# Altium PCB MSD.PcbDoc
Units mil, origin at the board's own origin, x right, y up, seen from the top; angles counter-clockwise.
Board outline 4360 x 1060 mil, 2 copper layers (Top Layer, Bottom Layer); 7 components, 3 nets, 15 pads, 0 vias.
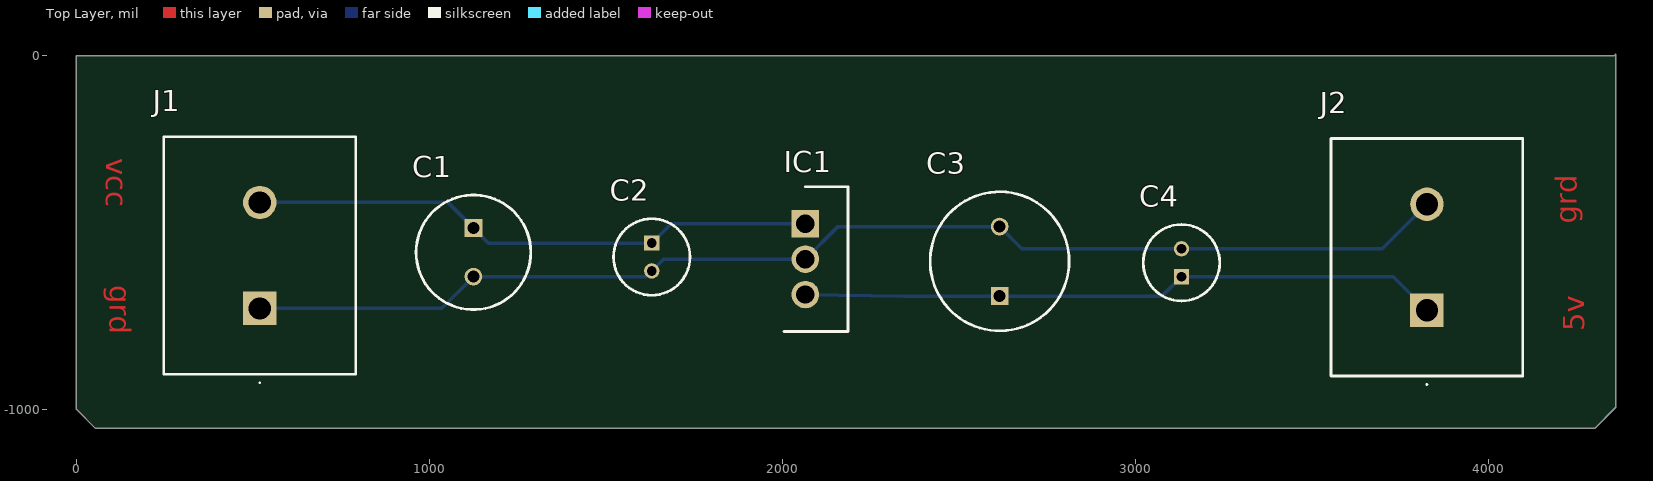
[diagram p0: Top Layer view]
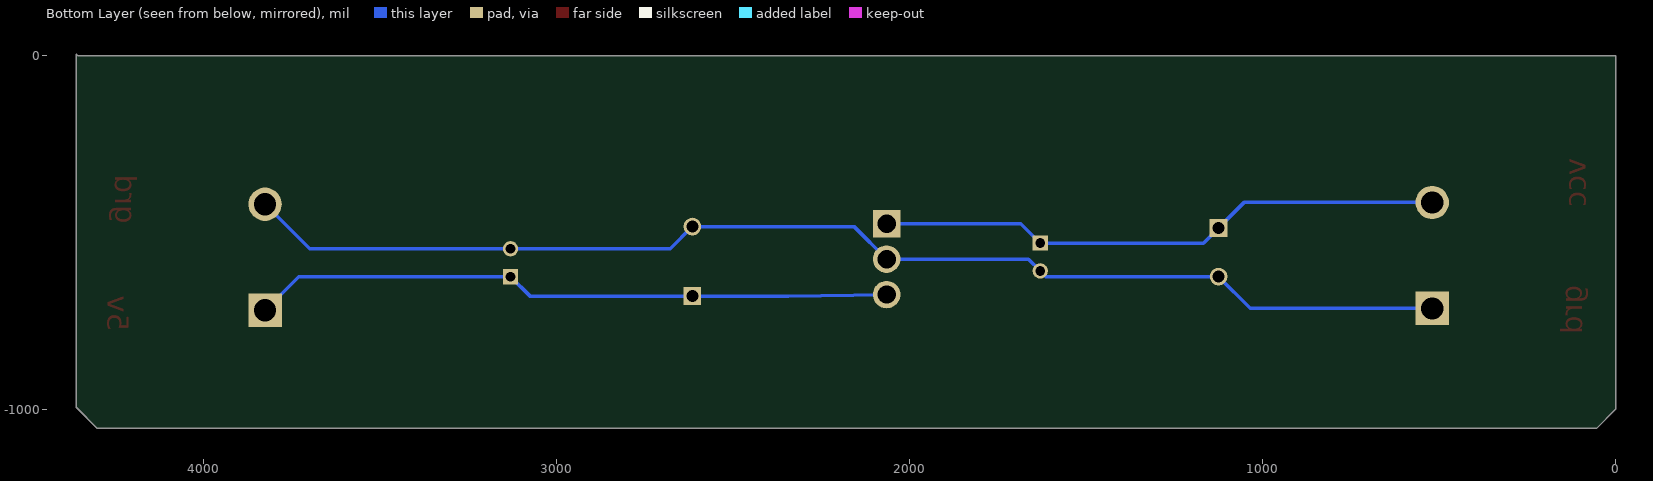
[diagram p1: Bottom Layer view, seen from below]
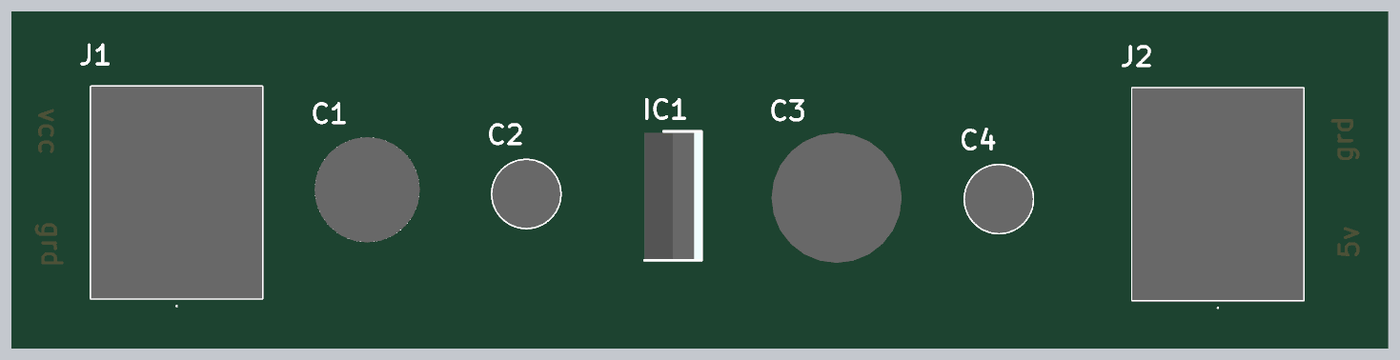
[diagram p2: 3D render of the assembled board from above, using the file's embedded part models]

## Layer stack, top to bottom
Top Solder: solder mask 0.4, Solder Resist, Dk 3.5
Top Layer: signal copper 1.4
Dielectric 1: dielectric 12.6, FR-4, Dk 4.8
Bottom Layer: signal copper 1.4
Bottom Solder: solder mask 0.4, Solder Resist, Dk 3.5

## Board outline
55,-1055 0,-1000 0,0 4355,0 4360,5 4360,-995 4300,-1055

## Design rules (kind name [scope] priority, off if disabled: settings)
Clearance [All] p1: gap=10 ignorepadtopadclearanceinfootprint=FALSE except(0: Arc-Hole Track-Hole SMDPad-Hole THPad-Hole Via-Hole Fill-Hole Poly-Hole Region-Hole Text-Hole)
PolygonConnect [All] p1: connectstyle=Relief reliefconductorwidth=10 reliefentries=4 polygonreliefangle="90 Angle" airgapwidth=10
RoutingVias [All] p1: holewidth=28 width=50 viastyle="Through Hole" minholewidth=28 minwidth=50 maxholewidth=28 maxwidth=50
SolderMaskExpansion [All] p1: expansion=4 istentingtop=FALSE
Width [All] p1: maxlimit=10 minlimit=10 preferedwidth=10
30 further rules are at their usual default settings.

## Components (designator, comment, footprint, x,y, rotation, side; value= is the part's Value field where it differs from the comment)
C1 "1uf" CAPPRD350W65D825H1250 1125,-487.2 r270 top
C2 "0.1uf" CAPPRD200W50D550H1250 1630,-530 r270 top
C3 "10uf" CAPPRD500W65D1000H2200 2615,-680 r90 top
C4 "0.1uf" CAPPRD200W50D550H1250 3130,-625 r90 top
IC1 "L7805CV" TO255P460X1020X2008-3P 2065,-475 r270 top
J1 "KF25C-7.62-2P" KF25C7622P 520,-715 r90 top
J2 "KF25C-7.62-2P" KF25C7622P 3825,-720 r90 top

## Footprints (in the part's own frame and the unit in brackets; to place one, negate y for a bottom-side part, rotate by r counter-clockwise, add the part's x,y. Pads: shape width x height; smd on the part's side, far side on the other; paste and mask are expansions set on the pad)
CAPPRD200W50D550H1250 [mm]
  rect 1.1x1.1 hole 0.7: 1(0,0)
  round 1.1 hole 0.7: 2(2,0)
  silkscreen extent -1.75,-2.75 3.75,2.75, body extent -1.74,-2.75 3.75,2.75, height 12.5
CAPPRD350W65D825H1250 [mm]
  rect 1.275x1.275 hole 0.85: 1(0,0)
  round 1.275 hole 0.85: 2(3.5,0)
  silkscreen extent -2.37,-4.13 5.87,4.13, body extent -2.49,-4.25 6,4.25, height 12.5
CAPPRD500W65D1000H2200 [mm]
  rect 1.275x1.275 hole 0.85: 1(0,0)
  round 1.275 hole 0.85: 2(5,0)
  silkscreen extent -2.5,-5 7.5,5, body extent -2.75,-5.24 7.75,5.24, height 22
KF25C7622P [mm]
  rect 2.4x2.4 hole 1.6: 1(0,0)
  round 2.4 hole 1.6: 2(7.62,0)
  silkscreen extent -5.4,-6.9 12.36,6.9, body extent -4.73,-6.9 12.35,6.9, height 15
TO255P460X1020X2008-3P [mm]
  rect 1.98x1.98 hole 1.32: 1(0,0)
  round 1.98 hole 1.32: 2(2.55,0) 3(5.1,0)
  silkscreen extent -2.65,-1.53 7.75,3.07, body extent -2.55,-1.53 7.65,3.07, height 19.21

## Part data
C1: library part ECA-2WM010, "Capacitor Polarised", Manufacturer_Name=Panasonic, Mouser Part Number=667-ECA-2WM010, Datasheet Link=http://www.mouser.com/ds/2/315/ABA0000C1047-947484.pdf, Height=12.5mm, Manufacturer_Part_Number=ECA-2WM010, Mouser Price/Stock=https://www.mouser.com/Search/Refine.aspx?Keyword=667-ECA-2WM010
C2 C4: library part UPS1H010MDD, "Capacitor", Manufacturer_Name=Nichicon, Mouser Part Number=647-UPS1H010MDD, Datasheet Link=http://nichicon-us.com/english/products/pdfs/e-ups.pdf, Height=12.5mm, Manufacturer_Part_Number=UPS1H010MDD, Mouser Price/Stock=https://www.mouser.co.uk/ProductDetail/Nichicon/UPS1H010MDD?qs=9WxBXDvRDok3DT3K8wfJRA%3D%3D
C3: library part EEU-EB2V100, "Capacitor Polarised", Manufacturer_Name=Panasonic, Mouser Part Number=667-EEU-EB2V100, Arrow Part Number=EEU-EB2V100, Arrow Price/Stock=https://www.arrow.com/en/products/eeu-eb2v100/panasonic?region=nac, Datasheet Link=http://industrial.panasonic.com/cdbs/www-data/pdf/RDF0000/ABA0000C1024.pdf, Height=22mm, Manufacturer_Part_Number=EEU-EB2V100, Mouser Price/Stock=https://www.mouser.co.uk/ProductDetail/Panasonic/EEU-EB2V100?qs=NWUXdpDx7QA5MeFM%2FszRZQ%3D%3D
IC1: "Integrated Circuit", Manufacturer_Name=STMicroelectronics, Mouser Part Number=511-L7805CV, Arrow Part Number=L7805CV, Arrow Price/Stock=https://www.arrow.com/en/products/l7805cv/stmicroelectronics?region=europe, Datasheet Link=http://www.st.com/web/en/resource/technical/document/datasheet/CD00000444.pdf, Height=4.6mm, Manufacturer_Part_Number=L7805CV, Mouser Price/Stock=https://www.mouser.co.uk/ProductDetail/STMicroelectronics/L7805CV?qs=9NrABl3fj%2FqplZAHiYUxWg%3D%3D
J1 J2: "Connector", Manufacturer_Name=KEFA, Datasheet Link=https://datasheet.lcsc.com/lcsc/2007211836_Cixi-Kefa-Elec-KF25C-7-62-2P_C707361.pdf, Height=14.9mm, Manufacturer_Part_Number=KF25C-7.62-2P

## Nets (pads, with @x,y where several pads share a name; then routed paths per layer and width w, separated by ;. In a path a pad name is that pad's centre, name@x,y a point inside that pad or via, vN(x,y) a via of type N, cw(c..) or ccw(c..) an arc to the next point about the centre after c; other vN are vias at no path point)
5v: C3.1 C4.1 IC1.3 J2.1 | length 1822.2
  Bottom Layer w10: IC1.3 2344.21,-680 C3.1 3075,-680 C4.1 3730,-625 J2.1
GND: C1.2 C2.2 C3.2 C4.2 IC1.2 J1.1 J2.2 | length 3479.5
  Bottom Layer w10: J1.1 1035,-715 C1.2 1613.74,-625 C2.2 1663.35,-575.39 IC1.2 2157.24,-483.15 C3.2 2678.11,-546.26 C4.2 3698.74,-546.26 J2.2
VCC: C1.1 C2.1 IC1.1 J1.2 | length 1615.4
  Bottom Layer w10: J1.2 1052.8,-415 C1.1 1167.8,-530 C2.1 1685,-475 IC1.1

## Other copper
Top Layer:
  text "vcc" at 85,-290 h60 r270
  text "grd" at 4250.01,-475 h60 r90
  text "grd" at 94.99,-650 h60 r270
  text "5v" at 4270,-780 h60 r90

## Silkscreen, mask and mechanical layers (free items; w line width, h text height)
CUTOUT:
  the board outline again, w10